# Altium PCB Basestation.PcbDoc
Units mm, origin at the board's own origin, x right, y up, seen from the top; angles counter-clockwise.
Board outline 152.4 x 76.2 mm, 2 copper layers (Top Layer, Bottom Layer); 58 components, 42 nets, 281 pads, 18 vias.
Unrouted connection lines stored in the file: 104.
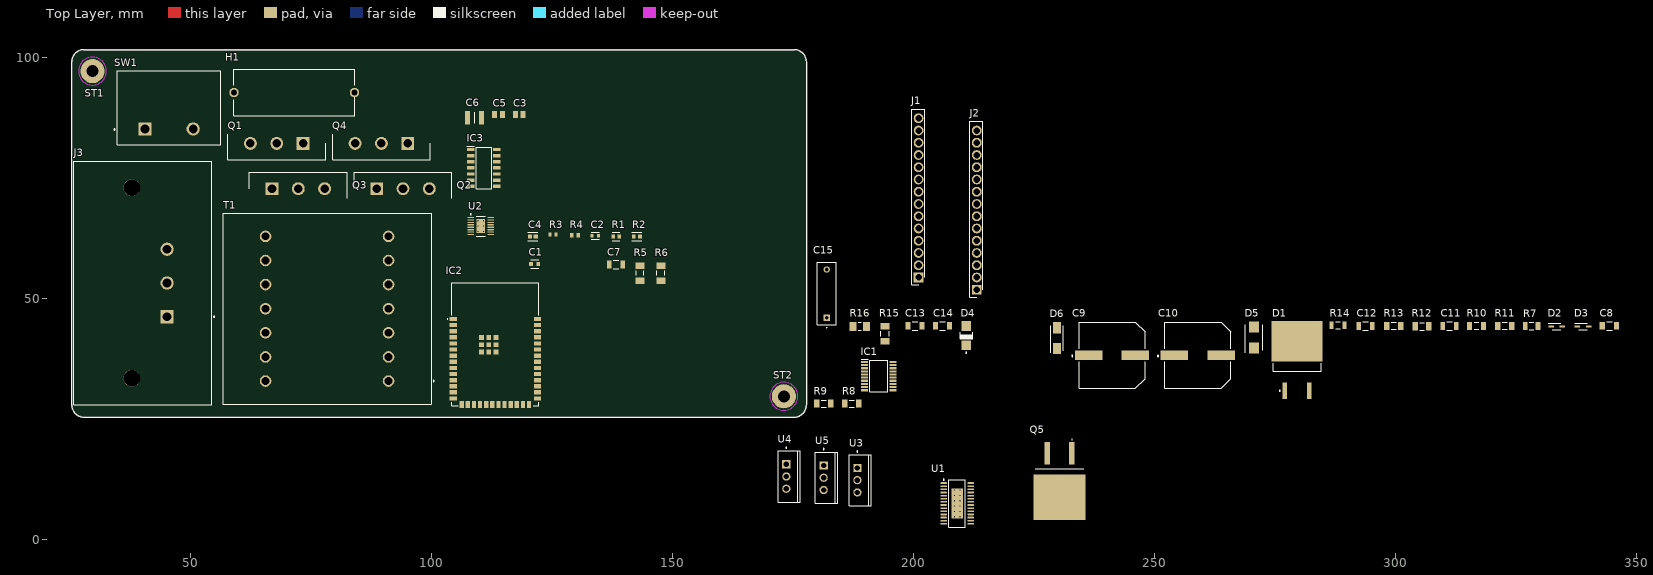
[diagram p0: Top Layer view]
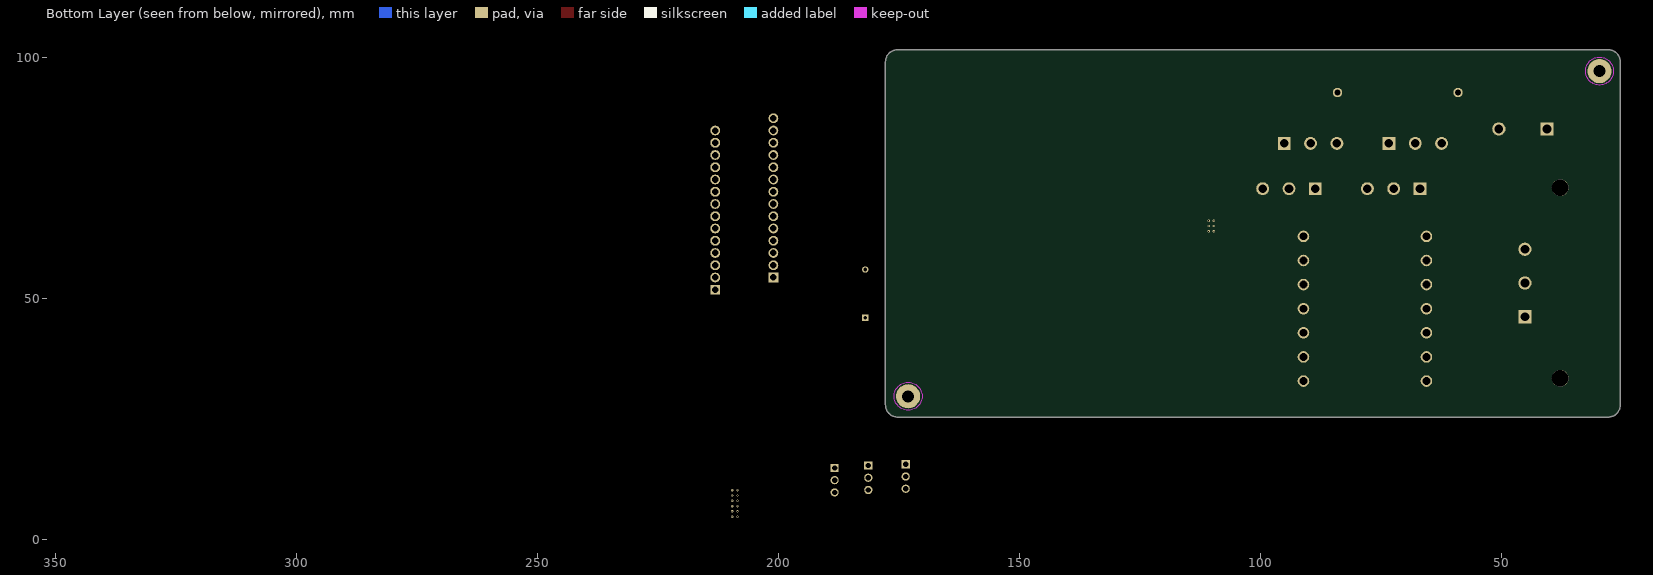
[diagram p1: Bottom Layer view, seen from below]

## Layer stack, top to bottom
Top Solder: solder mask 0.0102, Solder Resist, Dk 3.5
Top Layer: signal copper 0.0356
Dielectric 1: dielectric 0.32, FR-4, Dk 4.8
Bottom Layer: signal copper 0.0356
Bottom Solder: solder mask 0.0102, Solder Resist, Dk 3.5

## Board outline
25.4,27.94 25.4,99.06 cw(c27.94,99.06) 27.94,101.6 175.26,101.6 cw(c175.26,99.06) 177.8,99.06 177.8,27.94 cw(c175.26,27.94) 175.26,25.4 27.94,25.4 cw(c27.94,27.94)

## Design rules (kind name [scope] priority, off if disabled: settings)
Clearance [All] p1: gap=0.254 ignorepadtopadclearanceinfootprint=FALSE
PolygonConnect [All] p1: connectstyle=Relief reliefconductorwidth=0.254 reliefentries=4 polygonreliefangle="90 Angle" airgapwidth=0.254
RoomDefinition DSP [InComponentClass('DSP')] p1: confinementstyle=ConfineIn formatcopy=TRUE lockcomponents=FALSE outline 0,0 50.8,0 50.8,25.4 0,25.4
RoutingVias [All] p1: holewidth=0.711 width=1.27 viastyle="Through Hole" minholewidth=0.711 minwidth=1.27 maxholewidth=0.711 maxwidth=1.27
SolderMaskExpansion [All] p1: expansion=0.102 istentingtop=FALSE
SupplyNets "Schematic Supply Nets" [InNet('EARTH_GND')] p1: voltage=0.000
SupplyNets "Schematic Supply Nets_2" [InNet('DC_NEUTRAL')] p2: voltage=0.000
Width [All] p1: maxlimit=0.254 minlimit=0.254 preferedwidth=0.254
30 further rules are at their usual default settings.

## Classes and differential pairs
component class Wireless_and_DSP: IC2 J1 J2
component class DAC_and_amp: U1
component class Overview: ST1 ST2
component class Power: C1 C2 C3 C4 C5 C6 C7 C8 C9 C10 C11 C12 C13 C14 C15 D1 D2 D3 D4 D5 D6 H1 IC3 J3 Q1 Q2 Q3 Q4 Q5 R1 R2 R3 R4 R5 R6 R7 R8 R9 R10 R11 R12 R13 R14 R15 R16 SW1 T1 U2 U3 U4 U5

## Components (designator, comment, footprint, x,y, rotation, side; value= is the part's Value field where it differs from the comment)
C1 "CC0603KRX7R7BB104" FP-CC0603-DA-MFG 121.412,57.15 r0 top value="100 nF"
C2 "GRM188R71A225KE15D" FP-GRM188-0_1-e0_2_0_5-MFG 133.985,62.992 r0 top
C3 "220nF 50VAC 0805" CAPC2012X145N 118.237,88.138 r0 top
C4 "GRM188R61E475KE11D" FP-GRM188-0_15-IPC_C 121.031,62.865 r0 top
C5 "220nF 50VAC 0805" CAPC2012X145N 113.919,88.138 r0 top
C6 "22uF 25VDC 1210" CAPC3225X200N 108.966,87.503 r0 top
C7 "C1206C104KARACTU" FP-C1206C-EB-MFG 138.303,57.023 r0 top value="0.10 μF"
C8 "1206 10uF" FP-GRM31C-0_2-e0_3_0_8-MFG 344.297,44.323 r0 top
C9 "1000uF 25v" FP-FKH13-MFG 241.173,38.227 r0 top
C10 "1000uF 25v" FP-FKH13-MFG 258.953,38.227 r0 top
C11 "1206 22pF" FP-C1206C-EB-MFG 311.15,44.323 r0 top value="22 pF"
C12 "1206 22pF" FP-C1206C-EB-MFG 293.751,44.323 r0 top value="22 pF"
C13 "1206 10uF" FP-GRM31C-0_2-e0_3_0_8-MFG 200.279,44.323 r0 top
C14 "1206 10uF" FP-GRM31C-0_2-e0_3_0_8-MFG 205.994,44.323 r0 top
C15 "2.2nF y-cap" MKY22W12203D00KSSD 181.991,46.007 r90 top
D1 "MBRB20200CT" ONSC-D2PAK-3-418B-04_V 279.527,37.211 r90 top
D2 "BAV20WS-G3-08" SOD2713X115N 333.375,44.196 r0 top
D3 "BAV20WS-G3-08" SOD2713X115N 338.836,44.196 r0 top
D4 "1SMA5937BT3G" ONSC-SMA-2-403D-02_F_V 210.947,42.291 r90 top
D5 "SMBJ170A" DIOM5336X244N 270.637,41.91 r90 top
D6 "CMR1U-06M_TR13_PBFREE" DIOM5226X262N 229.743,41.783 r90 top
H1 "65600001409" 65600001409 59.055,92.71 r0 top
IC1 "PCM5102AQPWRQ1" SOP65P640X120-20N 192.786,33.909 r0 top
IC2 "ESP32-S3-WROOM-2-N32R16V" ESP32S3WROOM2N32R16V 113.271,40.5 r0 top
IC3 "TEA2208T_1J" SOIC127P600X175-14N 110.871,77.089 r0 top
J1 "PPTC141LFBN-RC" RHDR14W80P0X254_1X14_3606X254X850P 201.041,54.356 r90 top
J2 "PPTC141LFBN-RC" RHDR14W80P0X254_1X14_3606X254X850P 213.106,51.816 r90 top
J3 "703W-00/52" FP-703W-00-52-MFG 40.132,53.213 r270 top
Q1 "IXTX102N65X2" TO546P531X1980X2918-3P 73.384,82.169 r180 top
Q2 "IXTX102N65X2" TO546P531X1980X2918-3P 88.657,72.771 r0 top
Q3 "IXTX102N65X2" TO546P531X1980X2918-3P 66.94,72.771 r0 top
Q4 "IXTX102N65X2" TO546P531X1980X2918-3P 95.101,82.169 r180 top
Q5 "IPB60R165CP" IPB60R165CP 230.251,11.788 r90 top
R1 "100kohm 1% 0603" FP-CRCW0603-e3-IPC_C 138.303,62.865 r0 top
R2 "40.2kohm 1% 0603" FP-ERJ3EK-IPC_C 142.621,62.865 r0 top
R3 "221kohm 1% 0603" RESC1608X55X25LL10T15 125.222,63.246 r0 top
R4 "16.5kohm 1% 0603" RESC1608X55X25NL10T15 129.794,63.119 r0 top
R5 "1206 499k" FP-CRCW1206-e3-IPC_A 143.256,55.245 r90 top
R6 "1206 499k" FP-CRCW1206-e3-IPC_A 147.574,55.245 r90 top
R7 "1206 47ohm" FP-CRCW1206-e3-IPC_C 328.168,44.323 r0 top
R8 "1206 100k" RESC3216X60X45NL10T20 187.198,28.194 r0 top
R9 "1206 100k" RESC3216X60X45NL10T20 181.356,28.194 r0 top
R10 "1206 2.4M" RESC3116X65X40NL10T20 316.738,44.323 r0 top
R11 "1206 100k" RESC3216X60X45NL10T20 322.58,44.323 r0 top
R12 "1206 33k" FP-CRCW1206-e3-IPC_B 305.435,44.196 r0 top
R13 "1206 301k" RESC3216X60X45NL10T20 299.593,44.323 r0 top
R14 "1206 5.49k" RESC3216X60X45LL10T20 288.036,44.45 r0 top
R15 "1206 20" RESC3216X70X40ML20T20 194.056,42.672 r90 top
R16 "1206 0.03" RESC3216X89X51NL25T25 188.849,44.196 r0 top
ST1 "PTH-M2D5X5" PTH-M2D5X5 29.718,97.155 r0 top
ST2 "PTH-M2D5X5" PTH-M2D5X5 173.101,29.718 r0 top
SW1 "A8L-11-12N1" FP-A8L-11-12N1-MFG 45.593,89.535 r0 top
T1 "750811330" ETD34_750811330 78.359,47.879 r180 top
U1 "TPA3110D2PWPR" TI-PWP28-5720X1950TP_L 209.042,7.493 r0 top
U2 "LT3798EMSE#PBF" LT-MSE-16-EDP_L 110.236,65.024 r0 top
U3 "LT1084CT-12#PBF" LT-T-3 188.341,12.319 r0 top
U4 "LT1085CT-5#PBF" LT-T-3 173.609,13.081 r0 top
U5 "LT1085CT-3.3#PBF" LT-T-3 181.356,12.827 r0 top

## Footprints (in the part's own frame and the unit in brackets; to place one, negate y for a bottom-side part, rotate by r counter-clockwise, add the part's x,y. Pads: shape width x height; smd on the part's side, far side on the other; paste and mask are expansions set on the pad)
65600001409 [mm]
  round 1.95 hole 1.3: 1(0,0) 2(25,0)
  silkscreen extent 0,-4.8 25,4.8, body extent -1.45,-4.8 26.45,4.8, height 11.65
CAPC2012X145N [mm]
  rect 1.02x1.47 smd: 1(-0.8,0) 2(0.8,0)
  body extent -1,-0.63 1,0.63, height 1.45
CAPC3225X200N [mm]
  rect 1.02x2.82 smd: 1(-1.45,0) 2(1.45,0)
  silkscreen extent 0,-1.15 0,1.15, body extent -1.6,-1.25 1.6,1.25, height 2
DIOM5226X262N [mm]
  rect 2.35x1.7 smd: 1(-2.15,0) 2(2.15,0)
  silkscreen extent -3,-1.3 2.59,1.3, body extent -2.59,-1.3 2.59,1.3, height 2.62
DIOM5336X244N [mm]
  rect 2.25x2.05 smd: 1(-2.15,0) 2(2.15,0)
  silkscreen extent -3.17,-1.81 2.64,1.81, body extent -2.64,-1.81 2.64,1.81, height 2.44
ESP32S3WROOM2N32R16V [mm]
  rect 1.5x0.9 smd: 1(-8.75,5.26) 2(-8.75,3.99) 3(-8.75,2.72) 4(-8.75,1.45) 5(-8.75,0.18) 6(-8.75,-1.09) 7(-8.75,-2.36) 8(-8.75,-3.63) 9(-8.75,-4.9) 10(-8.75,-6.17) 11(-8.75,-7.44) 12(-8.75,-8.71) 13(-8.75,-9.98) 14(-8.75,-11.25) 27(8.75,-11.25) 28(8.75,-9.98) 29(8.75,-8.71) 30(8.75,-7.44) 31(8.75,-6.17) 32(8.75,-4.9) 33(8.75,-3.63) 34(8.75,-2.36) 35(8.75,-1.09) 36(8.75,0.18) 37(8.75,1.45) 38(8.75,2.72) 39(8.75,3.99) 40(8.75,5.26)
  rect 0.9x1.5 smd: 15(-6.985,-12.5) 16(-5.715,-12.5) 17(-4.445,-12.5) 18(-3.175,-12.5) 19(-1.905,-12.5) 20(-0.635,-12.5) 21(0.635,-12.5) 22(1.905,-12.5) 23(3.175,-12.5) 24(4.445,-12.5) 25(5.715,-12.5) 26(6.985,-12.5)
  rect 1x1 smd: 41(-1.36,-0.09) 42(-2.86,1.41) 43(-2.86,-0.09) 44(-2.86,-1.59) 45(-1.36,-1.59) 46(0.14,-1.59) 47(0.14,-0.09) 48(0.14,1.41) 49(-1.36,1.41)
  silkscreen extent -10,-12.75 9,12.75, body extent -9,-12.75 9,12.75, height 3.35
ETD34_750811330 [mm] "Offline Flyback Transformer, THT, body 43.18 x 39.60 mm"
  round 2.4 hole 1.6: 1(-12.75,15) 2(-12.75,10) 3(-12.75,5) 4(-12.75,0) 5(-12.75,-5) 6(-12.75,-10) 7(-12.75,-15) 8(12.75,-15) 9(12.75,-10) 10(12.75,-5) 11(12.75,0) 12(12.75,5) 13(12.75,10) 14(12.75,15)
  silkscreen extent -22.23,-19.8 21.59,19.8, body extent -21.59,-19.8 21.59,19.8, height 30.49
FP-703W-00-52-MFG [mm]
  rect 2.75x2.75 hole 1.8 paste-2539.97 mask+0: 1(7,5.05)
  round 2.75 hole 1.8 paste-2539.97 mask+0: 2(0,5.05) 3(-7,5.05)
  round 3.5 hole 3.5 unplated paste-2539.97 mask+0: ""(-19.75,-2.25) ""(19.75,-2.25)
  silkscreen extent -25.3,-14.35 25.3,14.93, body extent -25.4,-14.45 25.4,14.45, height 0.25
FP-A8L-11-12N1-MFG [mm]
  rect 2.75x2.75 hole 1.8 paste-2539.97 mask+0: 1(-5,-4.375)
  round 2.75 hole 1.8 paste-2539.97 mask+0: 2(5,-4.375)
  silkscreen extent -11.45,-7.7 10.7,7.7, body extent -10.8,-7.8 10.8,7.8, height 0.25
FP-C1206C-EB-MFG [mm]
  rect 0.95x1.7 smd paste+0 mask+0: 1(-1.4,0) 2(1.4,0)
  silkscreen extent -0.55,-0.9 0.55,0.9, body extent -2,-1 2,1, height 0.25
FP-CC0603-DA-MFG [mm]
  rect 0.8x0.9 smd paste+0 mask+0: 1(-0.75,0) 2(0.75,0)
  silkscreen extent -0.85,-0.85 0.85,0.85, body extent -1.35,-0.75 1.35,0.75, height 0.25
FP-CRCW0603-e3-IPC_C [mm]
  rect 0.735x0.862 smd paste+0 mask+0: 1(-0.615,0) 2(0.615,0)
  silkscreen extent -0.75,-0.85 0.75,0.85, body extent -1.08,-0.58 1.08,0.58, height 0.25
FP-CRCW1206-e3-IPC_A [mm]
  rect 1.356x1.858 smd paste+0 mask+0: 1(-1.526,0) 2(1.526,0)
  silkscreen extent -0.47,-0.8 0.47,0.8, body extent -2.7,-1.43 2.7,1.43, height 0.25
FP-CRCW1206-e3-IPC_B [mm]
  rect 1.156x1.758 smd paste+0 mask+0: 1(-1.426,0) 2(1.426,0)
  silkscreen extent -0.47,-0.8 0.47,0.8, body extent -2.25,-1.13 2.25,1.13, height 0.25
FP-CRCW1206-e3-IPC_C [mm]
  rect 0.956x1.658 smd paste+0 mask+0: 1(-1.326,0) 2(1.326,0)
  silkscreen extent -0.47,-0.8 0.47,0.8, body extent -1.9,-0.97 1.9,0.97, height 0.25
FP-ERJ3EK-IPC_C [mm]
  rect 0.757x0.862 smd paste+0 mask+0: 1(-0.651,0) 2(0.651,0)
  silkscreen extent -1.03,-0.87 1.03,0.87, body extent -1.13,-0.58 1.13,0.58, height 0.25
FP-FKH13-MFG [mm]
  rect 5.7x2 smd paste+0 mask+0: 1(-4.85,0) 2(4.85,0)
  silkscreen extent -8.37,-6.85 6.85,6.85, body extent -7.95,-7.1 7.95,7.1, height 0.25
FP-GRM31C-0_2-e0_3_0_8-MFG [mm]
  rect 1.05x1.6 smd paste+0 mask+0: 1(-1.475,0) 2(1.475,0)
  silkscreen extent -0.58,-0.9 0.58,0.9, body extent -2.1,-1 2.1,1, height 0.25
FP-GRM188-0_1-e0_2_0_5-MFG [mm]
  rect 0.65x0.7 smd paste+0 mask+0: 1(-0.675,0) 2(0.675,0)
  silkscreen extent -0.85,-0.75 0.85,0.75, body extent -1.1,-0.55 1.1,0.55, height 0.25
FP-GRM188-0_15-IPC_C [mm]
  rect 0.856x0.858 smd paste+0 mask+0: 1(-0.601,0) 2(0.601,0)
  silkscreen extent -1.03,-0.87 1.03,0.87
IPB60R165CP [mm]
  rect 4.6x1.2 smd: 1(6.125,-2.54) 3(6.125,2.54)
  rect 9.4x10.8 smd: 2(-3.025,0)
  silkscreen extent 2.86,-5 9,5.03, body extent -7.28,-5.03 7.96,5.03, height 4.83
LT-MSE-16-EDP_L [mm] "SOP, 16-Leads, Body 4.1x3.1mm, Pitch 0.5mm, Thermal Pad 2.95x1.76mm, IPC High Density"
  oval 1.4x0.25 smd: 1(-2.05,1.75) 2(-2.05,1.25) 3(-2.05,0.75) 4(-2.05,0.25) 5(-2.05,-0.25) 6(-2.05,-0.75) 7(-2.05,-1.25) 8(-2.05,-1.75) 9(2.05,-1.75) 10(2.05,-1.25) 11(2.05,-0.75) 12(2.05,-0.25) 13(2.05,0.25) 14(2.05,0.75) 15(2.05,1.25) 16(2.05,1.75)
  rect 1.76x2.95 smd: 17(0,0)
  silkscreen extent -2.17,-2.08 0.95,2.55, body extent -1.55,-2.05 1.55,2.05, height 1.1
LT-T-3 [mm] "T, 3-Leads, Body 10.55x4.6mm, Pitch 2.54mm"
  rect 1.7x1.7 hole 1.1: 1(0,2.54)
  round 1.7 hole 1.1: 2(0,0) 3(0,-2.54)
  silkscreen extent -1.7,-5.3 2.9,6.07, body extent -1.7,-5.28 2.9,5.28, height 22.15
MKY22W12203D00KSSD [mm]
  rect 1.3x1.3 hole 0.8: 1(0,0)
  round 1.3 hole 0.8: 2(10,0)
  silkscreen extent -2.1,-2 11.5,2, body extent -1.5,-2 11.5,2, height 9.6
ONSC-D2PAK-3-418B-04_V [mm] "DPAK, 3-Leads, Body 9.97x9.145mm, Pitch 2.54mm"
  rect 3.504x1.016 smd: 1(-6.35,2.54) 3(-6.35,-2.54)
  rect 8.38x10.49 smd: 4(3.9,0)
  silkscreen extent -6.47,-4.98 -0.69,4.98, body extent -2.3,-4.98 6.85,4.98, height 4.83
ONSC-SMA-2-403D-02_F_V [mm] "Molded, 2-Leads, Body 4.32x2.6mm"
  rect 2x2 smd: 1(-2,0) 2(2,0)
  silkscreen extent -3.67,-1.3 0.74,1.3, body extent -2.16,-1.3 2.16,1.3, height 2.2
PTH-M2D5X5 [mm]
  round 5 hole 2.5: 1(0,0)
RESC1608X55X25LL10T15 [mm] "Chip Resistor, 2-Leads, Body 1.60x0.80mm, IPC High Density"
  rect 0.6x0.8 smd: 1(-0.65,0) 2(0.65,0)
  body extent -0.85,-0.45 0.85,0.45, height 0.55
RESC1608X55X25NL10T15 [mm] "Chip Resistor, 2-Leads, Body 1.60x0.80mm, IPC Medium Density"
  rect 0.7x0.9 smd: 1(-0.7,0) 2(0.7,0)
  body extent -0.85,-0.45 0.85,0.45, height 0.55
RESC3116X65X40NL10T20 [mm] "Chip Resistor, 2-Leads, Body 3.10x1.60mm, IPC Medium Density"
  rect 1.05x1.7 smd: 1(-1.425,0) 2(1.425,0)
  silkscreen extent -0.5,-0.75 0.5,0.75, body extent -1.6,-0.85 1.6,0.85, height 0.65
RESC3216X60X45LL10T20 [mm] "Chip Resistor, 2-Leads, Body 3.20x1.60mm, IPC High Density"
  rect 0.9x1.6 smd: 1(-1.35,0) 2(1.35,0)
  silkscreen extent -0.5,-0.7 0.5,0.7, body extent -1.65,-0.85 1.65,0.85, height 0.6
RESC3216X60X45NL10T20 [mm] "Chip Resistor, 2-Leads, Body 3.20x1.60mm, IPC Medium Density"
  rect 1.1x1.7 smd: 1(-1.45,0) 2(1.45,0)
  silkscreen extent -0.5,-0.75 0.5,0.75, body extent -1.65,-0.85 1.65,0.85, height 0.6
RESC3216X70X40ML20T20 [mm] "Chip Resistor, 2-Leads, Body 3.20x1.60mm, IPC Low Density"
  rect 1.35x1.9 smd: 1(-1.575,0) 2(1.575,0)
  silkscreen extent -0.5,-0.85 0.5,0.85, body extent -1.7,-0.9 1.7,0.9, height 0.7
RESC3216X89X51NL25T25 [mm] "Chip Resistor, 2-Leads, Body 3.20x1.60mm, IPC Medium Density"
  rect 1.4x1.85 smd: 1(-1.4,0) 2(1.4,0)
  silkscreen extent -0.3,-0.82 0.3,0.82, body extent -1.73,-0.92 1.73,0.92, height 0.89
RHDR14W80P0X254_1X14_3606X254X850P [mm]
  rect 2.025x2.025 hole 1.35: 1(0,0)
  round 2.025 hole 1.35: 2(2.54,0) 3(5.08,0) 4(7.62,0) 5(10.16,0) 6(12.7,0) 7(15.24,0) 8(17.78,0) 9(20.32,0) 10(22.86,0) 11(25.4,0) 12(27.94,0) 13(30.48,0) 14(33.02,0)
  silkscreen extent -1.52,-1.27 34.89,1.46, body extent -1.52,-1.27 34.54,1.27, height 8.5
SOD2713X115N [mm]
  rect 1.125x0.5 smd: 1(-1.162,0) 2(1.162,0)
  silkscreen extent -1.73,-0.65 0.89,0.65, body extent -1.34,-0.65 1.34,0.65, height 1.15
SOIC127P600X175-14N [mm]
  rect 1.55x0.7 smd: 1(-2.725,3.81) 2(-2.725,2.54) 3(-2.725,1.27) 4(-2.725,0) 5(-2.725,-1.27) 6(-2.725,-2.54) 7(-2.725,-3.81) 8(2.725,-3.81) 9(2.725,-2.54) 10(2.725,-1.27) 11(2.725,0) 12(2.725,1.27) 13(2.725,2.54) 14(2.725,3.81)
  silkscreen extent -3.5,-4.33 1.6,4.51, body extent -3,-4.33 3,4.33, height 1.75
SOP65P640X120-20N [mm]
  rect 1.475x0.45 smd: 1(-2.938,2.925) 2(-2.938,2.275) 3(-2.938,1.625) 4(-2.938,0.975) 5(-2.938,0.325) 6(-2.938,-0.325) 7(-2.938,-0.975) 8(-2.938,-1.625) 9(-2.938,-2.275) 10(-2.938,-2.925) 11(2.938,-2.925) 12(2.938,-2.275) 13(2.938,-1.625) 14(2.938,-0.975) 15(2.938,-0.325) 16(2.938,0.325) 17(2.938,0.975) 18(2.938,1.625) 19(2.938,2.275) 20(2.938,2.925)
  silkscreen extent -3.67,-3.25 1.85,3.5, body extent -3.2,-3.25 3.2,3.25, height 1.13
TI-PWP28-5720X1950TP_L [mm] "SOP, 28-Leads, Body 9.8x4.5mm, Pitch 0.65mm, Thermal Pad 6.17x2.4mm, IPC High Density"
  oval 1.4x0.35 smd: 1(-2.8,4.225) 2(-2.8,3.575) 3(-2.8,2.925) 4(-2.8,2.275) 5(-2.8,1.625) 6(-2.8,0.975) 7(-2.8,0.325) 8(-2.8,-0.325) 9(-2.8,-0.975) 10(-2.8,-1.625) 11(-2.8,-2.275) 12(-2.8,-2.925) 13(-2.8,-3.575) 14(-2.8,-4.225) 15(2.8,-4.225) 16(2.8,-3.575) 17(2.8,-2.925) 18(2.8,-2.275) 19(2.8,-1.625) 20(2.8,-0.975) 21(2.8,-0.325) 22(2.8,0.325) 23(2.8,0.975) 24(2.8,1.625) 25(2.8,2.275) 26(2.8,2.925) 27(2.8,3.575) 28(2.8,4.225)
  rect 2.4x6.17 smd: 29(0,0)
  silkscreen extent -2.92,-4.9 1.7,5.07, body extent -2.25,-4.9 2.25,4.9, height 1.2
TO546P531X1980X2918-3P [mm]
  rect 2.67x2.67 hole 1.78: 1(0,0)
  round 2.67 hole 1.78: 2(5.46,0) 3(10.92,0)
  silkscreen extent -4.68,-1.94 15.61,3.37, body extent -4.44,-1.94 15.36,3.37, height 28.49

## Part data
C1: library part CMP-2000-05002-2, "CAP CER 0.1UF 16V X7R 0603", Capacitance="100 nF", Manufacturer=YAGEO, Package=CC0603-DA, Temperature="-55°C to +125°C", Temperature Characteristic=X7R, Temperature Coefficient=15%, Temperature Range High=+125°C, Temperature Range Low=-55°C, Tolerance=0.1, Voltage="16 V", Automotive=No, Category=Cap, ComponentLink2Description=Datasheet, ComponentLink2URL=http://www.yageo.com/documents/recent/UPY-GPHC_X7R_6.3V-to-50V_18.pdf, Device Class L1="Passive Components", Device Class L2=Capacitors, Device Class L3="Ceramic Capacitors", Digikey Description="CAP CER 0.1UF 16V X7R 0603", Footprint Url=http://www.yageo.com/exep/pages/download/literatures/UPY-C_GEN_24.pdf, Height=0.9mm, Lead Free=Yes, Manufacturer Part Number=CC0603KRX7R7BB104, Material=Ceramic, Mouser Description="Multilayer Ceramic Capacitor, CC Series, 0.1 - F, - 10%, X7R, 16 V, 0603 [1608 Metric]", Octopart=https://octopart.com/cc0603krx7r7bb104-yageo-192941, RoHS=TRUE, Voltage Rating="16 V"
C2: library part CMP-2006-02836-2, "Chip Multilayer Ceramic Capacitors for General Purpose, 0603, 2.2uF, X7R, 15%, 10%, 10V", Capacitance=2.2uF, Case Code (Imperial)=0603, Case Code (Metric)=1608, Dielectric=X7R, Max Operating Temperature=125°C, Min Operating Temperature=-55°C, Package Quantity=1, Tolerance=10%, Voltage=10V, Case/Package=0603, Depth=0.8mm, Height=0.8mm, Lead Free="Lead Free", Length=1.6mm, Material=Ceramic, Mount="Surface Mount", Number of Pins=2, Packaging="Cut Tape", REACH SVHC="No SVHC", Termination=SMD/SMT, Thickness=0.035inch, Voltage Rating=10V, Voltage Rating (DC)=10V, Weight=7.1E-05oz, Width=0.031inch
C3 C5: library part AC0805KFX7R9BB224, "Capacitor", Manufacturer_Name=KEMET, Datasheet Link=http://www.yageo.com/documents/recent/UPY-AC_NP0X7R_16V-to-630V_12.pdf, Height=1.45mm, Manufacturer_Part_Number=AC0805KFX7R9BB224
C4: library part CMP-2006-02523-2, "Chip Multilayer Ceramic Capacitors for General Purpose, 0603, 4.7uF, X5R, 15%, 10%, 25V", Capacitance=4.7uF, Case Code (Imperial)=0603, Case Code (Metric)=1608, Dielectric=X5R, Max Operating Temperature=85°C, Min Operating Temperature=-55°C, Package Quantity=4000, Tolerance=10%, Voltage=25V, Case/Package=0603, Depth=0.8mm, Height=0.8mm, Lead Free="Lead Free", Length=1.6mm, Material=Ceramic, Mount="Surface Mount", Packaging="Cut Tape", REACH SVHC="No SVHC", Thickness=0.031inch, Voltage Rating=25V, Voltage Rating (DC)=25V, Width=0.031inch
C6: library part 25MU225MB23225, "Capacitor", Manufacturer_Name=Rubycon, Mouser Part Number=232-25MU225MB23225, Datasheet Link=http://www.rubycon.co.jp/en/catalog/e_pdfs/pmlcap/e_MU.pdf, Height=2mm, Manufacturer_Part_Number=25MU225MB23225, Mouser Price/Stock=https://www.mouser.co.uk/ProductDetail/Rubycon/25MU225MB23225?qs=T3oQrply3y80th0zXFlwOw%3D%3D
C7: library part CMP-1037-04229-2, "CAP CER 0.1UF 250V X7R 1206", Capacitance="0.10 μF", Manufacturer=KEMET, Package=C1206C-EB, Temperature="-55°C to +150°C", Temperature Characteristic=X7R, Temperature Coefficient=15%, Temperature Range High=+150°C, Temperature Range Low=-55°C, Tolerance=0.1, Voltage Rating="250 V", Automotive=Yes, Automotive Grade="Grade 0", Category=Cap, ComponentLink2Description=Datasheet, ComponentLink2URL=https://content.kemet.com/datasheets/KEM_C1007_X8R_ULTRA_150C_SMD.pdf, Device Class L1="Passive Components", Device Class L2=Capacitors, Device Class L3="Ceramic Capacitors", Digikey Description="CAP CER 0.1UF 250V X7R 1206", Height=0.88mm, Ipc Land Pattern Name=CAPC320160X78, Lead Free=Yes, Manufacturer Part Number=C1206C104KARACTU, Material=Ceramic, Mouser Description="Multilayer Ceramic Capacitors MLCC - SMD/SMT 250volts 0.1uF X7R 10%", Octopart=https://octopart.com/c1206c104karactu-kemet-193627, RoHS=TRUE
C8 C13 C14: library part CMP-06035-003589-1, "Chip Multilayer Ceramic Capacitors for General Purpose, 1206, 10uF, X7R, 15%, 10%, 25V", Capacitance=10uF, Case Code (Imperial)=1206, Case Code (Metric)=3216, Dielectric=X7R, Max Operating Temperature=125°C, Min Operating Temperature=-55°C, Package Quantity=1, Tolerance=10%, Voltage=25V, Case/Package=1206, Depth=1.6mm, Height=1.6mm, Lead Free="Lead Free", Length=3.2mm, Material=Ceramic, Mount="Surface Mount", Number of Pins=2, Packaging="Tape and Reel", Radiation Hardening=No, REACH SVHC="No SVHC", Termination=SMD/SMT, Thickness=0.071inch, Voltage Rating=25V, Voltage Rating (DC)=25V, Width=1.6mm
C9 C10: library part CMP-05427-002158-1, "CAP ALUM 1000UF 20% 25V SMD", Capacitance=1mF, Case/Package=Radial, ESR (Equivalent Series Resistance)=60mR, Max Operating Temperature=105°C, Min Operating Temperature=-55°C, Package Quantity=200, Ratings=AEC-Q200, Ripple Current=1.1A, Tolerance=20%, Voltage=25V, Construction=Cylindrical, Diameter=12.5mm, Height=13.5mm, Height - Seated (Max)=0.55inch, Impedance=60mR, Lead Free="Lead Free", Length=13.5mm, Life (Hours)=5000Hour, Mount="Surface Mount", Packaging="Tape and Reel", Polarity=Polar, Radiation Hardening=No, Reach SVHC Compliant=Yes, Ripple Current (AC)=1.1A, RoHS Compliant=Yes, Series=FK, Termination=SMD/SMT, Voltage Rating=25V, Voltage Rating (DC)=25V
C11 C12: library part CMP-1037-00989-2, "CAP CER 22PF 100V 5% NP0 1206", Capacitance="22 pF", Manufacturer=KEMET, Manufacturer Part Number=C1206C220J1GACTU, Package=C1206C-EB, Temperature="-55°C to +150°C", Temperature Characteristic=C0G, Temperature Coefficient=15%, Temperature Range High=+150°C, Temperature Range Low=-55°C, Tolerance=0.05, Voltage Rating="100 V", Automotive=Yes, Automotive Grade="Grade 0", Category=Cap, ComponentLink2Description=Datasheet, ComponentLink2URL=https://content.kemet.com/datasheets/KEM_C1007_X8R_ULTRA_150C_SMD.pdf, Device Class L1="Passive Components", Device Class L2=Capacitors, Device Class L3="Ceramic Capacitors", Digikey Description="CAP CER 22PF 100V 5% NP0 1206", Height=0.88mm, Ipc Land Pattern Name=CAPC320160X78, Lead Free=Yes, Material=Ceramic, Mouser Description="1206 22pF Ceramic Multilayer Capacitor; 100VDC; 125degC; C0G Dielec; +/-5% SMD", Octopart=https://octopart.com/c1206c220j1gactu-kemet-9145181, RoHS=TRUE
C15: library part MKY22W12203D00KSSD, "Capacitor", Manufacturer_Name=WIMA, Mouser Part Number=505-MKY22W12203DKSSD, Datasheet Link=https://eu.mouser.com/datasheet/2/440/e_WIMA_MKP_Y2-1139883.pdf, Height=9.5mm, Manufacturer_Part_Number=MKY22W12203D00KSSD, Mouser Price/Stock=https://www.mouser.co.uk/ProductDetail/WIMA/MKY22W12203D00KSSD?qs=z5u5uZJqM4Oanxl7ljBHlQ%3D%3D
D1: library part CMP-1055-00130-1, "SWITCHMODE(TM) Power Rectifier, Dual Schottky Rectifiers, 3-Pin D2PAK, Tube", Manufacturer="On Semiconductor", ComponentLink1Description="Manufacturer URL", ComponentLink1URL=http://www.onsemi.com/, ComponentLink2Description=Datasheet, ComponentLink2URL=http://www.onsemi.cn/pub_link/Collateral/MBRB20200CT-D.PDF, ComponentLink3Description="Package Specification", ComponentLink3URL=http://www.onsemi.com/pub_link/Collateral/418B-04.PDF, Configuration="Common Cathode", DatasheetVersion="Rev. 7", IFSM Max (A)=150, Mounting Technology="Surface Mount", Note1=0, PackageDescription="3-Pin Flange Mount, Body 9.145 x 9.97 mm, Pitch 2.54 mm", PackageReference=D2PAK-3-418B-04, PackageVersion="Rev. K, 09/2008", Packing=Tube, PartNumber=MBRB20200CT, RoHS=FALSE
D2 D3: "Diode", Manufacturer_Name=Vishay, Mouser Part Number=78-BAV20WS-G3-08, Arrow Part Number=BAV20WS-G3-08, Arrow Price/Stock=https://www.arrow.com/en/products/bav20ws-g3-08/vishay?region=nac, Datasheet Link=https://componentsearchengine.com/Datasheets/1/BAV20WS-G3-08.pdf, Height=1.15mm, Manufacturer_Part_Number=BAV20WS-G3-08, Mouser Price/Stock=https://www.mouser.co.uk/ProductDetail/Vishay-Semiconductors/BAV20WS-G3-08?qs=ROh%252BA47s9d2Jk9K4pPeq%252BQ%3D%3D
D4: library part CMP-1060-00094-1, "1.5 W Zener Voltage Regulator, 2-Pin SMA, Pb-Free, Tape and Reel", Manufacturer="On Semiconductor", ComponentLink1Description="Manufacturer URL", ComponentLink1URL=http://www.onsemi.com/, ComponentLink2Description=Datasheet, ComponentLink2URL=http://www.onsemi.com/pub_link/Collateral/1SMA5913BT3-D.PDF, ComponentLink3Description="Package Specification", ComponentLink3URL=http://www.onsemi.com/pub_link/Collateral/1SMA5913BT3-D.PDF, DatasheetVersion="Rev. 8", Mounting Technology="Surface Mount", PackageDescription="2-Pin Small Molded Package, J-Bend Lead, Body 2.605 x 4.315 mm", PackageReference=SMA-2-403D-02_F, PackageVersion="Rev. F, 11/2008", Packing="Tape and Reel", PartNumber=1SMA5937BT3G, RoHS=Pb-Free, VZ Typ (V)=33
D5: "TVS Diode (Uni-directional)", Manufacturer_Name="HY Electronic", Height=2.44mm, Manufacturer_Part_Number=SMBJ170A
D6: "Diode", Manufacturer_Name="Central Semiconductor", Manufacturer_Part_Number="CMR1U-06M TR13 PBFREE", Mouser Part Number=610-CMR1U-06M, Datasheet Link=https://my.centralsemi.com/datasheets/CMR1U01M.PDF, Height=2.62mm, Mouser Price/Stock=https://www.mouser.co.uk/ProductDetail/Central-Semiconductor/CMR1U-06M-TR13-PBFREE/?qs=u16ybLDytRaiTbcu0RAPhw%3D%3D
H1: "Hardware", Manufacturer_Name=LITTELFUSE, Mouser Part Number=576-65600001409, Arrow Part Number=65600001409, Arrow Price/Stock=https://www.arrow.com/en/products/65600001409/littelfuse?utm_currency=USD&region=nac, Datasheet Link=https://www.littelfuse.com/media?resourcetype=datasheets&itemid=7143dbe7-66cc-46d0-a668-04c7d18969fc&filename=littelfuse-fuse-block-656-datasheet, Height=12.7mm, Manufacturer_Part_Number=65600001409, Mouser Price/Stock=https://www.mouser.co.uk/ProductDetail/Littelfuse/65600001409?qs=ubGq6M%252B9ToVYxvlW0XHBFQ%3D%3D
IC1: "Integrated Circuit", Manufacturer_Name="Texas Instruments", Mouser Part Number=595-PCM5102AQPWRQ1, Arrow Part Number=PCM5102AQPWRQ1, Arrow Price/Stock=https://www.arrow.com/en/products/pcm5102aqpwrq1/texas-instruments?utm_currency=USD&region=nac, Datasheet Link=http://www.ti.com/lit/gpn/pcm5102a-q1, Height=1.2mm, Manufacturer_Part_Number=PCM5102AQPWRQ1, Mouser Price/Stock=https://www.mouser.co.uk/ProductDetail/Texas-Instruments/PCM5102AQPWRQ1?qs=wqe5ZXqX%252B9%252B9Oa8bkTy%252BXw%3D%3D
IC2: "Integrated Circuit", Manufacturer_Name="Espressif Systems", Mouser Part Number=356-SP32S3WM2N32R16V, Datasheet Link=https://www.espressif.com/sites/default/files/documentation/esp32-s3-wroom-2_datasheet_en.pdf, Height=3.25mm, Manufacturer_Part_Number=ESP32-S3-WROOM-2-N32R16V, Mouser Price/Stock=https://www.mouser.co.uk/ProductDetail/Espressif-Systems/ESP32-S3-WROOM-2-N32R16V?qs=%252BHhoWzUJg4Kf%2FwmS40wg%252BQ%3D%3D
IC3: "Integrated Circuit", Manufacturer_Name=NXP, Manufacturer_Part_Number=TEA2208T/1J, Mouser Part Number=771-TEA2208T/1J, Datasheet Link=https://www.nxp.com/docs/en/data-sheet/TEA2208T.pdf, Height=1.75mm, Mouser Price/Stock=https://www.mouser.co.uk/ProductDetail/NXP-Semiconductors/TEA2208T-1J?qs=wnTfsH77Xs7i9IS7OBVq2w%3D%3D
J1 J2: "Connector", Manufacturer_Name=Sullins, Datasheet Link=http://www.sullinscorp.com/drawings/78_P(N)PxCxxxLFBN-RC,_10492-H.pdf, Height=8.5mm, Manufacturer_Part_Number=PPTC141LFBN-RC
J3: library part CMP-64678-000001-1, "PWR ENT RCPT IEC320-C14 PNL SLDR", Color=Black, Current=15A, Max Voltage Rating (AC)=250V, Package Quantity=100, Approvals=UL, Connector Type=Receptacle, Contact Plating=Tin, Current Rating=15A, Fuse=No, Gender=Receptacle, Housing Material=Thermoplastic, Lead Free="Lead Free", Max Current Rating=15A, Mount="Through Hole", Number of Contacts=3, Number of Poles=2, Number of Positions=3, Orientation="Right Angle", Packaging=Bulk, Panel Thickness=0.12inch, Pitch=7mm, REACH SVHC="No SVHC", Termination=Solder, Voltage Rating=250V, Voltage Rating (AC)=250V, Voltage Rating (DC)=250V
Q1 Q2 Q3 Q4: "MOSFET (N-Channel)", Manufacturer_Name=LITTELFUSE, Mouser Part Number=747-IXTX102N65X2, Datasheet Link=http://ixapps.ixys.com/DataSheet/DS100655B(IXTK-TX102N65X2).pdf, Height=5.31mm, Manufacturer_Part_Number=IXTX102N65X2, Mouser Price/Stock=https://www.mouser.com/Search/Refine.aspx?Keyword=747-IXTX102N65X2
Q5: "MOSFET (N-Channel)", Manufacturer_Name=Infineon, Mouser Part Number=726-IPB60R165CP, Datasheet Link=https://www.infineon.com/dgdl/Infineon-IPB60R165CP-DS-v02_01-en.pdf?fileId=db3a304412b407950112b42dd38f48fc, Height=4.826mm, Manufacturer_Part_Number=IPB60R165CP, Mouser Price/Stock=https://www.mouser.co.uk/ProductDetail/Infineon-Technologies/IPB60R165CP?qs=mzcOS1kGbgdcrfUvmAosLQ%3D%3D
R1: library part CMP-2000-03823-2, "RES Thick Film, 100kΩ, 5%, 0.1W, 200ppm/°C, 0603", Case Code (Imperial)=0603, Case Code (Metric)=1608, Max Operating Temperature=155°C, Max Power Dissipation=100mW, Min Operating Temperature=-55°C, Package Quantity=1, Resistance=100kR, Temperature Coefficient=200ppm/°C, Tolerance=5%, Voltage Rating=75V, Case/Package=0603, Composition="Thick Film", Contact Plating=Tin, Depth=0.85mm, Features="Automotive AEC-Q200", Height=0.02inch, Length=1.55mm, Military Standard=Not, Mount="Surface Mount", Number of Pins=2, Number of Terminations=2, Packaging="Tape and Reel", Power Rating=100mW, Radiation Hardening=No, Termination=SMD/SMT, Weight=7.1E-05oz, Width=0.85mm, Working Voltage=75V
R2: library part CMP-2000-00486-2, "RES SMD 40.2K OHM 1% 1/10W 0603", Case Code (Imperial)=0603, Case Code (Metric)=1608, Max Operating Temperature=155°C, Max Power Dissipation=100mW, Min Operating Temperature=-55°C, Package Quantity=1, Resistance=40.2kR, Resistance Tolerance=1%, Resistor Type="Thick Film", Temperature Coefficient=100ppm/°C, Voltage Rating=75V, Voltage Rating (DC)=50V, Case/Package=0603, Construction=Rectangular, Contact Plating=Tin, Depth=0.8mm, Features="Automotive AEC-Q200", Height=0.45mm, Lead Free="Lead Free", Length=1.6mm, Military Standard=Not, Mount="Surface Mount", Number of Terminations=2, Packaging="Tape and Reel", Power Rating=100mW, Radiation Hardening=No, RoHS Compliant=Yes, Series=ERJ, Technology="THICK FILM", Termination=SMD/SMT, Tolerance=1%, Weight=7.1E-05oz, Width=0.031inch
R3: library part CMP-2000-03957-1, Manufacturer=Yageo, Part Number=RC0603FR-07221KL
R4: library part CMP-2000-04912-1, Manufacturer=Yageo, Part Number=RC0603FR-0716K5L
R5 R6: library part CMP-1014-00815-3, "RES Thick Film, 499kΩ, 1%, 0.25W, 100ppm/°C, 1206", Case Code (Imperial)=1206, Case Code (Metric)=3216, Max Operating Temperature=155°C, Max Power Dissipation=250mW, Min Operating Temperature=-55°C, Package Quantity=10, Resistance=499kR, Temperature Coefficient=100ppm/°C, Tolerance=1%, Voltage Rating=200V, Case/Package=1206, Composition="Thick Film", Contact Plating=Tin, Depth=1.6mm, Features="Automotive AEC-Q200", Height=0.55mm, Lead Free="Lead Free", Length=3.2mm, Military Standard=Not, Mount="Surface Mount", Number of Pins=2, Number of Terminations=2, Packaging="Tape and Reel", Power Rating=250mW, Radiation Hardening=No, Termination=Solder, Voltage Rating (DC)=200V, Weight=0.000353oz, Width=1.6mm
R7: library part CMP-2003-02215-2, "RES Thick Film, 47Ω, 1%, 0.25W, 100ppm/°C, 1206", Case Code (Imperial)=1206, Case Code (Metric)=3216, Max Operating Temperature=155°C, Max Power Dissipation=250mW, Min Operating Temperature=-55°C, Package Quantity=10, Resistance=47R, Temperature Coefficient=100ppm/°C, Tolerance=1%, Voltage Rating=200V, Case/Package=1206, Composition="Thick Film", Contact Plating=Tin, Depth=1.6mm, Features="Automotive AEC-Q200", Height=0.55mm, Lead Free="Lead Free", Length=3.2mm, Military Standard=Not, Mount="Surface Mount", Number of Terminations=2, Packaging="Tape and Reel", Power Rating=250mW, Radiation Hardening=No, Termination=SMD/SMT, Voltage Rating (DC)=200V, Weight=0.000353oz, Width=0.063inch
R8 R9 R11: library part CMP-1014-00736-2, Manufacturer="Vishay Dale", Part Number=CRCW1206100KFKEA
R10: library part CMP-2003-03682-1, Manufacturer=Yageo, Part Number=RC1206FR-072M4L
R12: library part CMP-2003-02103-2, "RES Thick Film, 33kΩ, 1%, 0.25W, 100ppm/°C, 1206", Case Code (Imperial)=1206, Case Code (Metric)=3216, Max Operating Temperature=155°C, Max Power Dissipation=250mW, Min Operating Temperature=-55°C, Package Quantity=10, Resistance=33kR, Temperature Coefficient=100ppm/°C, Tolerance=1%, Voltage Rating=200V, Case/Package=1206, Composition="Thick Film", Contact Plating=Tin, Depth=1.6mm, Features="Automotive AEC-Q200", Height=0.55mm, Lead Free="Lead Free", Length=3.2mm, Military Standard=Not, Number of Terminations=2, Packaging="Tape and Reel", Power Rating=250mW, Radiation Hardening=No, Termination=SMD/SMT, Voltage Rating (DC)=200V, Weight=0.000353oz, Width=1.6mm, Working Voltage=200V
R13: library part CMP-2003-02078-1, Manufacturer="Vishay Dale", Part Number=CRCW1206301KFKEA
R14: library part CMP-2003-02301-1, Manufacturer="Vishay Dale", Part Number=CRCW12065K49FKEA
R15: library part CMP-2003-04567-1, Manufacturer="KOA Speer", Part Number=RK73B2BTTD200J
R16: library part CMP-2003-04356-1, Manufacturer="Vishay Dale", Part Number=WSL1206R0300FEA
ST1 ST2: library part CMP-00028-00004-2, "M2 PTH (2.5mm), 5mm pad", Pins=1
SW1: library part CMP-08830-000001-1, "SWITCH ROCKER SPST 10A 125V", Current Rating=10A, Max Operating Temperature=55°C, Max Voltage Rating (AC)=250V, Min Operating Temperature=-20°C, Voltage Rating (AC)=125V, Electrical Life=10000Cycles, Mechanical Life=50000Cycles, Mount=Panel, Orientation=Straight, Packaging=Bulk, Radiation Hardening=No, RoHS Compliant=Yes, Switch Function=On-Off, Termination="PC Pins", Throw Configuration=SPST
T1: library part CMP-012-00033-1, "WE-OLLT Offline Flyback Transformer, THT, ETD34, Ui = 85 - 265V, Uo = 18V / 5A", Auxiliary Voltage=18V, Case/Package=ETD34, Inductance=300uH, Input Voltage="85 - 265V (AC)", Insulation Test Voltage="4500V (AC)", Manufacturer="Wurth Elektronik", Operating Temperature Max=125°C, Operating Temperature Min=-40°C, Output Current=5A, Saturation Current=4A, Switching Frequency=200kHz, Category="Transformers For AC-DC Converter", Component Type=Standard, ComponentLink1Description="Website Link", ComponentLink1URL=https://www.we-online.com/redexpert/article/750811330?ad, ComponentLink2Description="Datasheet Link", ComponentLink2URL=https://www.we-online.com/redexpert/spec/750811330?ad, Design Item ID=750811330, Height=30.48mm, Length=39.6mm, Manufacturer Part Number=750811330, Match Code=WE-OLLT, Mount="Through Hole", Output Voltage=18V, Packaging=Tray, Pins=10, Source=WE-OLLT.SchLib, Width=43.18mm
U1: library part CMP-0994-00255-1, "15 W Filter-Free Class D Stereo Amplifier with SpeakerGuard(TM), -40 to 85 degC, 28-pin SOP (PWP28), Green (RoHS & no Sb/Br)", Manufacturer="Texas Instruments", Power Stage Supply Min(V)=8, Analog Supply Max [V]=26, Analog Supply Min [V]=8, Code_JEDEC=MO-153, ComponentLink1Description="Manufacturer URL", ComponentLink1URL=http://www.ti.com/, ComponentLink2Description=Datasheet, ComponentLink2URL=http://www.ti.com/general/docs/lit/getliterature.tsp?genericPartNumber=TPA3110D2&fileType=pdf, ComponentLink3Description="Package Specification", ComponentLink3URL=http://www.ti.com/litv/pdf/mpds373, DatasheetVersion=SLOS528D, Eco-Plan="Green (RoHS & no Sb/Br)", Input Type=Analog, Max. Number of Speaker Outputs=2, Mounting Technology="Surface Mount", PackageDescription="28-Pin Plastic Small Outline, Body 4.4 x 9.7 mm, Pitch 0.65 mm", PackageReference=PWP28-5720X1950TP, PackageVersion="4073225-6/I, 05/2011", PartNumber=TPA3110D2PWPR, SubFamily="Mid/High-Power Amplifier"
U2: library part CMP-0491-01149-1, "Isolated No Opto-Coupler Flyback Controller with Active PFC, 16-pin SOP (MSE-16-EDP), -40 to 125 degC, Pb-Free", Manufacturer="Linear Technology", ComponentLink1Description="Manufacturer URL", ComponentLink1URL=http://www.linear.com/, ComponentLink2Description=Datasheet, ComponentLink2URL=http://cds.linear.com/docs/en/datasheet/3798fa.pdf, ComponentLink3Description="Package Specification", ComponentLink3URL=http://cds.linear.com/docs/en/packaging/05081667_F_MSE16.pdf, DatasheetVersion="Rev. A", Mounting Technology="Surface Mount", Number of Outputs=1, PackageDescription="16-Pin Plastic MSOP, Exposed Die Pad, Body 4.039 x 3 mm, Pitch 0.5 mm", PackageReference=MSE-16, PackageVersion="Rev. F, 05/2013", PartNumber=LT3798EMSE#PBF, RoHS=TRUE
U3: library part CMP-0476-01883-1, "5 A Low Dropout Positive Regulator, 2.55 to 30 V Vin, 12 V Vout, 3-pin FM (T-3), 0 to 150 degC, Pb-Free", Dropout Voltage(V)=1.3, Manufacturer="Linear Technology", Output Voltage="12 V", ComponentLink1Description="Manufacturer URL", ComponentLink1URL=http://www.linear.com/, ComponentLink2Description=Datasheet, ComponentLink2URL=http://cds.linear.com/docs/en/datasheet/1083ffd.pdf, ComponentLink3Description="Package Specification", ComponentLink3URL=http://cds.linear.com/docs/en/packaging/TO-220_3_05-08-1420.pdf, DatasheetVersion="Rev. D", Discrete Pass Element=no, Iout(mA)=5000, Isupply(mA)=5, Mounting Technology="Through Hole", Number of Outputs=1, PackageDescription="3-Pin Plastic TO-220, Body 10.2235 x 4.3815 mm, Pitch 2.54 mm", PackageReference=T-3, PackageVersion=Jun-10, PartNumber=LT1084CT-12#PBF, PSRR(dB)=60, RoHS=TRUE, Vin Max(V)=30, Vin Min(V)=2.55
U4: library part CMP-0476-01878-1, "3 A Low Dropout Positive Regulator, 4.3 to 25 V Vin, 5 V Vout, 3-pin FM (T-3), 0 to 150 degC, Pb-Free", Dropout Voltage(V)=1.3, Manufacturer="Linear Technology", Output Voltage="5 V", ComponentLink1Description="Manufacturer URL", ComponentLink1URL=http://www.linear.com/, ComponentLink2Description=Datasheet, ComponentLink2URL=http://cds.linear.com/docs/en/datasheet/1083ffd.pdf, ComponentLink3Description="Package Specification", ComponentLink3URL=http://cds.linear.com/docs/en/packaging/TO-220_3_05-08-1420.pdf, DatasheetVersion="Rev. D", Discrete Pass Element=no, Iout(mA)=3000, Isupply(mA)=5, Mounting Technology="Through Hole", Number of Outputs=1, PackageDescription="3-Pin Plastic TO-220, Body 10.2235 x 4.3815 mm, Pitch 2.54 mm", PackageReference=T-3, PackageVersion=Jun-10, PartNumber=LT1085CT-5#PBF, PSRR(dB)=72, RoHS=TRUE, Vin Max(V)=25, Vin Min(V)=4.3
U5: library part CMP-0476-01879-1, "3 A Low Dropout Positive Regulator, 4.3 to 25 V Vin, 3.3 V Vout, 3-pin FM (T-3), 0 to 150 degC, Pb-Free", Dropout Voltage(V)=1.3, Manufacturer="Linear Technology", Output Voltage="3.3 V", ComponentLink1Description="Manufacturer URL", ComponentLink1URL=http://www.linear.com/, ComponentLink2Description=Datasheet, ComponentLink2URL=http://cds.linear.com/docs/en/datasheet/1083ffd.pdf, ComponentLink3Description="Package Specification", ComponentLink3URL=http://cds.linear.com/docs/en/packaging/TO-220_3_05-08-1420.pdf, DatasheetVersion="Rev. D", Discrete Pass Element=no, Iout(mA)=3000, Isupply(mA)=5, Mounting Technology="Through Hole", Number of Outputs=1, PackageDescription="3-Pin Plastic TO-220, Body 10.2235 x 4.3815 mm, Pitch 2.54 mm", PackageReference=T-3, PackageVersion=Jun-10, PartNumber=LT1085CT-3.3#PBF, PSRR(dB)=72, RoHS=TRUE, Vin Max(V)=25, Vin Min(V)=4.3

## Via types
v1: diameter 0.5, hole 0.2, Top Layer to Bottom Layer, 18 vias

## Nets (pads, with @x,y where several pads share a name; then routed paths per layer and width w, separated by ;. In a path a pad name is that pad's centre, name@x,y a point inside that pad or via, vN(x,y) a via of type N, cw(c..) or ccw(c..) an arc to the next point about the centre after c; other vN are vias at no path point)
3.3V_DC_OUT: U5.2
5V_DC_OUT: U4.2
12V_DC_OUT: U3.2
AC_LIVE: C3.1 H1.2 IC3.1 Q1.2 Q3.3
AC_NEUTRAL: C5.1 IC3.10 J3.1 Q2.2 Q4.3
DC_NEUTRAL: C2.1 C4.2 C6.1 C7.2 C8.1 C9.1 C10.1 C12.2 C13.2 C14.2 C15.1 C15.2 D4.2 IC3.7 Q1.3 Q2.3 R3.2 R4.2 R13.2 R14.2 R16.2 T1.7 T1.8 T1.9 T1.10 U2.17 U3.1 U4.1 U5.1
  other v1: 109.686,63.924 110.786,63.924 109.686,65.024 110.786,65.024 109.686,66.124 110.786,66.124
DC_POSITIVE: C7.1 D5.2 IC3.14 Q3.2 Q4.2 R5.2 R8.1 T1.4
EARTH_GND: J3.2 ST1.1 ST2.1
GATE_HL: IC3.3 Q3.1
GATE_HR: IC3.12 Q4.1
GATE_LL: IC3.5 Q1.1
GATE_LR: IC3.8 Q2.1
LT3798_DCM: R12.2 U2.10
LT3798_EN/UVLO: R10.2 R13.1 U2.12
LT3798_FB: C12.1 R11.2 R14.1 U2.9
LT3798_GATE: R15.1 U2.14
LT3798_SENSE: Q5.3 R16.1 U2.15
LT3798_VIN: C8.2 D2.1 D3.1 R10.1 U2.11
LT3798_VIN_SENSE: R6.1 U2.16
NetC1_1: C1.1 U2.7
NetC1_2: C1.2 U2.8
NetC2_2: C2.2 U2.6
NetC3_2: C3.2 IC3.2
NetC4_1: C4.1 U2.13
NetC5_2: C5.2 IC3.11
NetC6_2: C6.2 IC3.6
NetC11_2: C11.2 R12.1
NetD2_2: D2.2 R9.2
NetD3_2: D3.2 R7.1
NetD5_1: D5.1 D6.1
NetH1_1: H1.1 SW1.2
NetJ3_3: J3.3 SW1.1
NetQ5_1: Q5.1 R15.2
NetR1_1: R1.1 R2.1 U2.2 U2.3 U2.4
NetR1_2: R1.2 R3.1 U2.5
NetR2_2: R2.2 R4.1 U2.1
NetR5_1: R5.1 R6.2
NetR8_2: R8.2 R9.1
SCHOTTKY_OUT: C9.2 C10.2 C13.1 C14.1 D1.4 D4.1 U3.3 U4.3 U5.3
TRAN_AUX_P: C11.1 R7.2 R11.1 T1.6
TRAN_IN_P: D6.2 Q5.2 T1.2
TRAN_OUT_P: D1.1 D1.3 T1.12 T1.13 T1.14
pads on no net: IC1.1 IC1.2 IC1.3 IC1.4 IC1.5 IC1.6 IC1.7 IC1.8 IC1.9 IC1.10 IC1.11 IC1.12 IC1.13 IC1.14 IC1.15 IC1.16 IC1.17 IC1.18 IC1.19 IC1.20 IC2.1 IC2.2 IC2.3 IC2.4 IC2.5 IC2.6 IC2.7 IC2.8 IC2.9 IC2.10 IC2.11 IC2.12 IC2.13 IC2.14 IC2.15 IC2.16 IC2.17 IC2.18 IC2.19 IC2.20 IC2.21 IC2.22 IC2.23 IC2.24 IC2.25 IC2.26 IC2.27 IC2.28 IC2.29 IC2.30 IC2.31 IC2.32 IC2.33 IC2.34 IC2.35 IC2.36 IC2.37 IC2.38 IC2.39 IC2.40 IC2.41 IC2.42 IC2.43 IC2.44 IC2.45 IC2.46 IC2.47 IC2.48 IC2.49 IC3.4 IC3.9 IC3.13 J1.1 J1.2 J1.3 J1.4 J1.5 J1.6 J1.7 J1.8 J1.9 J1.10 J1.11 J1.12 J1.13 J1.14 J2.1 J2.2 J2.3 J2.4 J2.5 J2.6 J2.7 J2.8 J2.9 J2.10 J2.11 J2.12 J2.13 J2.14 J3. T1.1 T1.3 T1.5 T1.11 U1.1 U1.2 U1.3 U1.4 U1.5 U1.6 U1.7 U1.8 U1.9 U1.10 U1.11 U1.12 U1.13 U1.14 U1.15 U1.16 U1.17 U1.18 U1.19 U1.20 U1.21 U1.22 U1.23 U1.24 U1.25 U1.26 U1.27 U1.28 U1.29
copper on no net:
  other v1: 208.492,4.743 209.592,4.743 208.492,5.843 209.592,5.843 208.492,6.943 209.592,6.943 208.492,8.043 209.592,8.043 208.492,9.143 209.592,9.143 208.492,10.243 209.592,10.243

## Keep-outs
Keep-Out Layer:
  circle w0.254: c29.718,97.155 r2.9
  circle w0.254: c173.101,29.718 r2.9

## Silkscreen, mask and mechanical layers (free items; w line width, h text height)
Top Overlay:
  the board outline again, w0.254